# Altium PCB airDrums.PcbDoc
Units mm, origin at the board's own origin, x right, y up, seen from the top; angles counter-clockwise.
Board outline 100 x 14 mm, 2 copper layers (Top Layer, Bottom Layer); 9 components, 12 nets, 55 pads, 0 vias.
Unrouted connection lines stored in the file: 23.
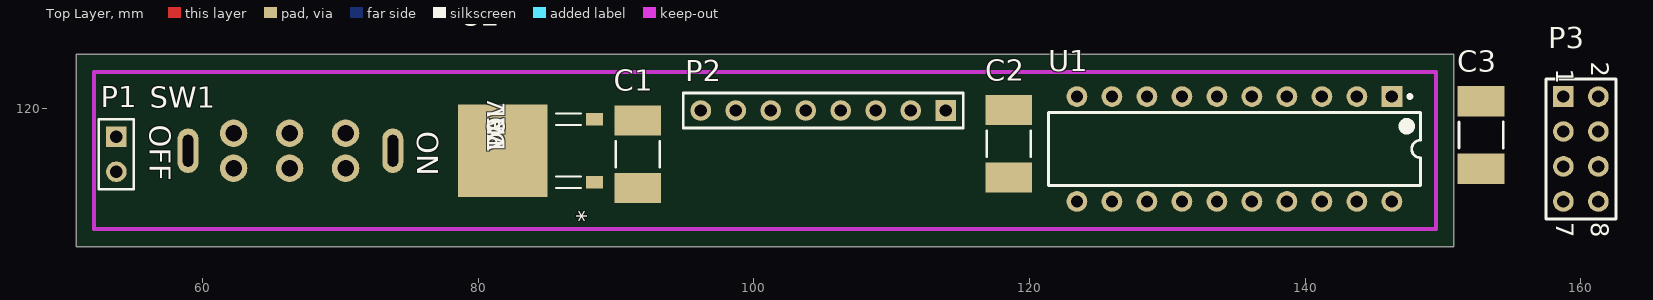
[diagram p0: Top Layer view]
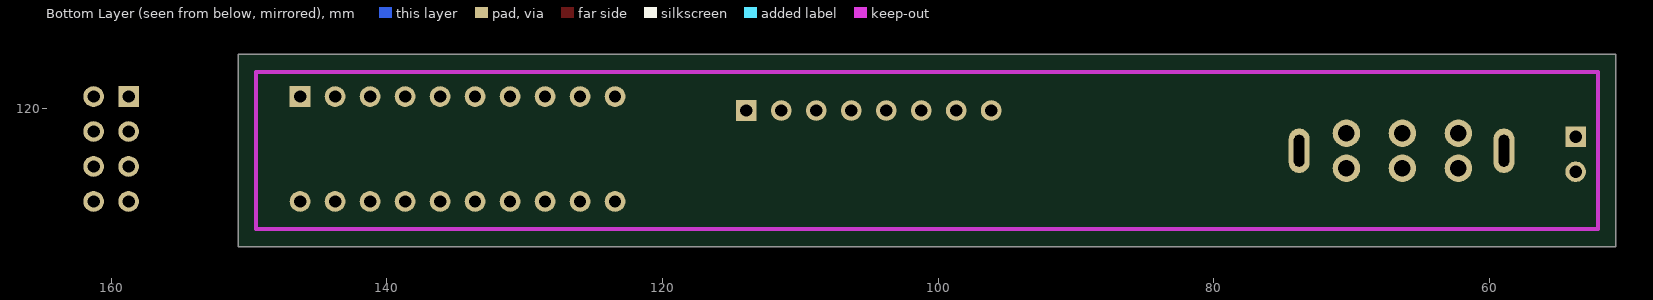
[diagram p1: Bottom Layer view, seen from below]

## Layer stack, top to bottom
Top Layer: signal copper 0.0356
Dielectric: dielectric 0.32, FR-4, Dk 4.8
Bottom Layer: signal copper 0.0356

## Board outline
50.8,109.982 150.8,109.982 150.8,123.982 50.8,123.982

## Design rules (kind name [scope] priority, off if disabled: settings)
Clearance [All] p1: gap=0.3
PolygonConnect [All] p1: connectstyle=Relief reliefconductorwidth=0.254 reliefentries=4 polygonreliefangle="90 Angle" airgapwidth=0.254
RoutingVias [All] p1: holewidth=0.8 width=1.6 viastyle="Through Hole" minholewidth=0.711 minwidth=1.27 maxholewidth=0.711 maxwidth=1.27
SolderMaskExpansion [All] p1: expansion=0.102
Width [All] p1: maxlimit=0.3 minlimit=0.3 preferedwidth=0.3
28 further rules are at their usual default settings.

## Components (designator, comment, footprint, x,y, rotation, side; value= is the part's Value field where it differs from the comment)
C1 "100uF" CAPC6032X28N 91.567,116.713 r270 top
C2 "100uF" CAPC6032X28N 118.491,117.475 r90 top
C3 "100uF" CAPC6032X28N 152.781,118.11 r270 top
P1 "Header 2" HDR1X2 53.721,117.983 r270 top
P2 "Header 8" HDR1X8 113.919,119.888 r180 top
P3 "Header 4X2" HDR2X4 158.75,120.904 r270 top
SW1 "switch" Switch 66.548,115.697 r270 top
U1 "MSP430G2553IN20" TI-N20 134.874,117.094 r270 top
U2 "LP38690_NDP_3" TD03B 81.915,116.967 r90 top

## Footprints (in the part's own frame and the unit in brackets; to place one, negate y for a bottom-side part, rotate by r counter-clockwise, add the part's x,y. Pads: shape width x height; smd on the part's side, far side on the other; paste and mask are expansions set on the pad)
CAPC6032X28N [mm] "Chip Capacitor, 2-Leads, Body 6.00x3.25mm, IPC Medium Density"
  rect 2.2x3.4 smd: 1(-2.45,0) 2(2.45,0)
  silkscreen extent -0.95,-1.6 0.95,1.6, body extent -3.1,-1.7 3.1,1.7, height 2.8
HDR1X2 [mm] "Connector; Header; 2 Position"
  rect 1.5x1.5 hole 0.9: 1(0,0)
  round 1.5 hole 0.9: 2(2.54,0)
  silkscreen extent -1.27,-1.27 3.81,1.27
HDR1X8 [mm] "Connector; Header; 8 Position"
  rect 1.5x1.5 hole 0.9: 1(0,0)
  round 1.5 hole 0.9: 2(2.54,0) 3(5.08,0) 4(7.62,0) 5(10.16,0) 6(12.7,0) 7(15.24,0) 8(17.78,0)
  silkscreen extent -1.27,-1.27 19.05,1.27
HDR2X4 [mm] "Connector; Header; 4x2 Position"
  rect 1.5x1.5 hole 0.9: 1(0,0)
  round 1.5 hole 0.9: 2(0,2.54) 3(2.54,0) 4(2.54,2.54) 5(5.08,0) 6(5.08,2.54) 7(7.62,0) 8(7.62,2.54)
  silkscreen extent -1.27,-1.27 8.89,3.81
Switch [mm]
  round 2 hole 1.2: 1(-2.54,3.81) 2(-2.54,-0.254) 3(-2.54,-4.318) 4(0,-4.318) 5(0,-0.254) 6(0,3.81)
  oval 3.24x1.524 hole 0.762 slot 2.3 at 0 deg: 7(-1.27,7.239) 8(-1.27,-7.62)
TD03B [mil]
  rect 35x48 smd: 1(-89.96,-256) 3(89.96,-256)
  rect 265x256 smd: 2(0,6)
  silkscreen extent -106,-218 106,-146
TI-N20 [mm] "DIP, 20-Leads, Body 25.4x6.35 mm, Pitch 2.54 mm"
  rect 1.5x1.5 hole 0.9: 1(-3.81,11.43)
  round 1.5 hole 0.9: 2(-3.81,8.89) 3(-3.81,6.35) 4(-3.81,3.81) 5(-3.81,1.27) 6(-3.81,-1.27) 7(-3.81,-3.81) 8(-3.81,-6.35) 9(-3.81,-8.89) 10(-3.81,-11.43) 11(3.81,-11.43) 12(3.81,-8.89) 13(3.81,-6.35) 14(3.81,-3.81) 15(3.81,-1.27) 16(3.81,1.27) 17(3.81,3.81) 18(3.81,6.35) 19(3.81,8.89) 20(3.81,11.43)
  silkscreen extent -3.93,-13.5 2.65,13.5, body extent -3.95,-13.45 3.95,13.45, height 5.08

## Part data
C1 C2 C3: library part "Cap Semi", "Capacitor (Semiconductor SIM Model)"
P1: "Header, 2-Pin"
P2: "Header, 8-Pin"
P3: "Header, 4-Pin, Dual row"
U1: "16 MHz Mixed Signal Microcontroller with 16 KB Flash, 512 B SRAM and 24 GPIOs, -40 to 85 degC, 20-pin DIP (N), Pb-Free (RoHS)"
U2: "Imported"

## Nets (pads, with @x,y where several pads share a name; then routed paths per layer and width w, separated by ;. In a path a pad name is that pad's centre, name@x,y a point inside that pad or via, vN(x,y) a via of type N, cw(c..) or ccw(c..) an arc to the next point about the centre after c; other vN are vias at no path point)
CE: P3.3 U1.9
CSN: P3.4 U1.7
GND: C1.1 C2.1 C3.1 P1.2 P2.2 P3.1 U1.20 U2.2
IRQ: P3.8 U1.8
MISO: P3.7 U1.3
MOSI: P3.6 U1.4
NetP1_1: P1.1 SW1.2
NetSW1_1: SW1.1 U2.3
SCK: P3.5 U1.6
SCL: P2.3 U1.14
SDA: P2.4 U1.15
VCC: C1.2 C2.2 C3.2 P2.1 P3.2 U1.1 U2.1
pads on no net: P2.5 P2.6 P2.7 P2.8 SW1.3 SW1.4 SW1.5 SW1.6 SW1.7 SW1.8 U1.2 U1.5 U1.10 U1.11 U1.12 U1.13 U1.16 U1.17 U1.18 U1.19

## Keep-outs
Keep-Out Layer:
  lines w0.3: 52.1,111.282 149.5,111.282 149.5,122.682 52.1,122.682 52.1,111.282

## Silkscreen, mask and mechanical layers (free items; w line width, h text height)
Drill Drawing:
  text ".LEGEND" at 155.88,81.28 h1.52
  text "Drill Drawing." at 155.88,78.74 h1.52

## Dimensions
52.1,111.282 to 149.5,111.282 on Mechanical 1
52.1,111.282 to 52.1,122.682 on Mechanical 1

## Text inside footprints (layer, text, board x,y; h text height)
P3: Top Overlay "8" at 160.782,111.76 h1.27 r270; Top Overlay "7" at 158.242,111.76 h1.27 r270; Top Overlay "1" at 158.242,122.936 h1.27 r270; Top Overlay "2" at 160.782,123.444 h1.27 r270
SW1: Top Overlay "OFF" at 56.134,118.872 h1.52 r270; Top Overlay "ON" at 75.565,118.364 h1.52 r270
U2: Top Overlay "TOL" at 81.915,116.967 h1.27 r90; Top Overlay "VAL" at 81.915,116.967 h1.27 r90; Top Overlay "DEV" at 81.915,116.967 h1.27 r90; Top Overlay "PN" at 81.915,116.967 h1.27 r90; Top Overlay "*" at 88.417,111.762 h1.27 r90; Mechanical 1 "RefDes2" at 81.915,116.967 h1.27 r90; Mechanical 1 "*" at 88.417,111.762 h1.27 r90